# EAGLE board zerofat2_old (EAGLE 7.5.0)
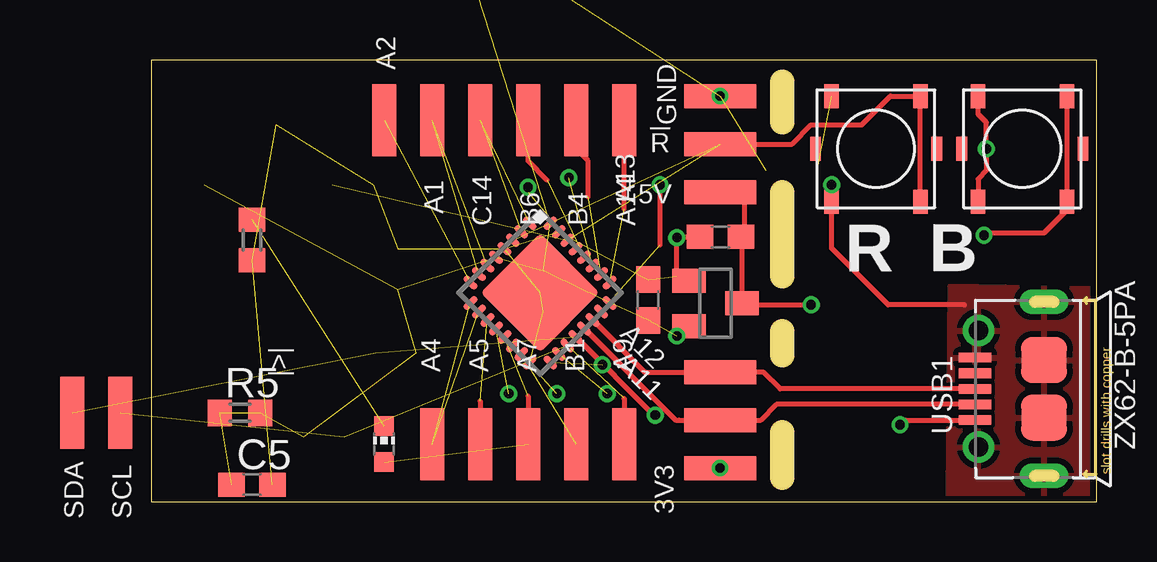
[diagram p0: board, top side]
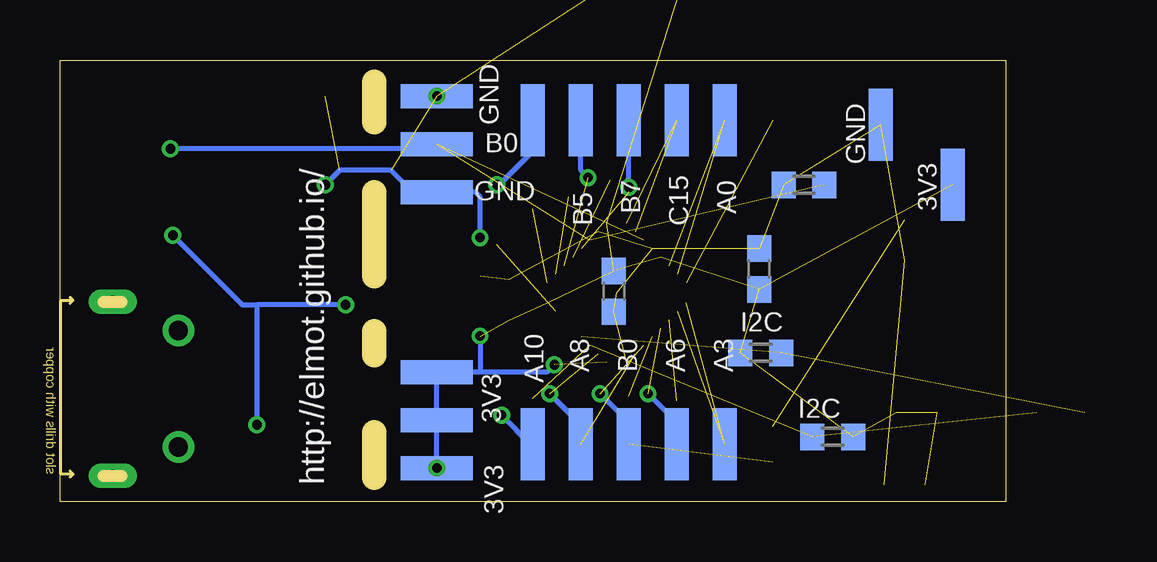
[diagram p1: board, bottom side, seen from below]

Size 39.4 x 18.4 mm. Coordinates in mm from the lower left corner, seen from the top.
Outline: 26.3,1 26.3,2.9
Outline: 26.3,9.4 26.3,12.9
Outline: 26.3,15.8 26.3,17.5
Outline: 26.3,6.1 26.3,7.1
Outline: 0,0 39.4,0 39.4,18.4 0,18.4 0,0
Copper layers (1*16): Top 0.035mm / dielectric 1.5mm / Bottom 0.035mm
Design rules "SeeedStudio_2layer_DRU_no_angle_20140221 *": minimum track width 6mil, minimum drill 12mil, track to track 6mil, track to pad 6mil, pad to pad 6mil, via to via 6mil, smd to smd 0mil, copper to edge 10mil, drill to drill 10mil, minimum pad ring 10mil, minimum via ring 6mil, stop-mask expansion 2mil, vias tented up to drill 100mil, thermal gap 10mil
Net classes: 0 default: width 0.2 mm; 1 PWR: width 0.2 mm; 2 GND: width 0.2 mm

## Footprints (pad centres in the part's own frame; a part is rotated, then mirrored left to right if it is on the bottom)
EVQPT5A15 = smd 0.45 x 1: GND1 -2.525,0; GND2 2.525,0 | smd 0.6 x 1: P1 -1.85,-2.2; P2 -1.85,2.2; P3 1.85,2.2; P4 1.85,-2.2
C0603 = smd 1.1 x 1: 1 -0.85,0; 2 0.85,0
SOT23 = smd 1 x 1.4: 1 -0.95,-1.1; 2 0.95,-1.1; 3 0,1.1
CHIP-LED0603 = smd 0.8 x 0.8: A 0,-0.75; C 0,0.75
PAD_MINIMAL = smd 1 x 3: 1 0,0
R0603 = smd 1 x 1.1: 1 -0.85,0; 2 0.85,0
UFQFPN32 = smd 0.7 x 0.3: 1 -2.35,1.75; 2 -2.35,1.25; 3 -2.35,0.75; 4 -2.35,0.25; 5 -2.35,-0.25; 6 -2.35,-0.75; 7 -2.35,-1.25; 8 -2.35,-1.75; 17 2.35,-1.75; 18 2.35,-1.25; 19 2.35,-0.75; 20 2.35,-0.25; 21 2.35,0.25; 22 2.35,0.75; 23 2.35,1.25; 24 2.35,1.75 | smd 0.3 x 0.7: 9 -1.75,-2.35; 10 -1.25,-2.35; 11 -0.75,-2.35; 12 -0.25,-2.35; 13 0.25,-2.35; 14 0.75,-2.35; 15 1.25,-2.35; 16 1.75,-2.35; 25 1.75,2.35; 26 1.25,2.35; 27 0.75,2.35; 28 0.25,2.35; 29 -0.25,2.35; 30 -0.75,2.35; 31 -1.25,2.35; 32 -1.75,2.35 | smd 3.5 x 3.5: EXP 0,0
MICRO-USB5+6P-SMD-0.65-AB = smd 0.4 x 1.35: 1 -1.3,2.875; 2 -0.65,2.875; 3 0,2.875; 4 0.65,2.875; 5 1.3,2.875 | smd 1.9 x 1.9: P1 -1.2,0; P2 1.2,0 | drill 0.508 pad 1.016 long: P3 -3.625,0; P4 3.625,0 | drill 0.8: P5 -2.425,2.73; P6 2.425,2.73

## Placement (x,y rotation side)
B  EVQPT5A15  [EVQPT5A15]  36.3,14.7 0 top
C1  1uF  [C0603]  23.72,11.03 180 top
C2  100nF  [C0603]  13.98,22.65 180 bottom  (outside the outline)
C3  100nF  [C0603]  16.33,8.76 270 bottom
C4  100nF  [C0603]  10.27,9.69 90 bottom
C5  1uF  [C0603]  4.2,0.7 0 top
C6  4.7uF  [C0603]  20.7,8.4 270 top
IC1  MCP1703T-3302E/CB  [SOT23]  23.51,8.26 270 top
LED1  ORANGE  [CHIP-LED0603]  9.7,2.4 0 top
PAD1  SCL  [PAD_MINIMAL]  -1.3,3.7 0 top
PAD2  SDA  [PAD_MINIMAL]  -3.3,3.7 0 top  (outside the outline)
PAD3  C14  [PAD_MINIMAL]  13.7,15.9 0 top
PAD4  C15  [PAD_MINIMAL]  13.7,15.9 0 bottom
PAD6  !R  [PAD_MINIMAL]  23.7,14.9 90 top
PAD8  A0  [PAD_MINIMAL]  11.7,15.9 0 bottom
PAD9  A2  [PAD_MINIMAL]  9.7,15.9 0 top
PAD10  A1  [PAD_MINIMAL]  11.7,15.9 0 top
PAD11  A3  [PAD_MINIMAL]  11.7,2.4 180 bottom
PAD12  A5  [PAD_MINIMAL]  13.7,2.4 180 top
PAD13  A7  [PAD_MINIMAL]  15.7,2.4 180 top
PAD14  B1  [PAD_MINIMAL]  17.7,2.4 180 top
PAD16  A4  [PAD_MINIMAL]  11.7,2.4 180 top
PAD17  A6  [PAD_MINIMAL]  13.7,2.4 180 bottom
PAD18  B0  [PAD_MINIMAL]  15.7,2.4 180 bottom
PAD24  A8  [PAD_MINIMAL]  17.7,2.4 180 bottom
PAD25  A9  [PAD_MINIMAL]  19.7,2.4 180 top
PAD26  A10  [PAD_MINIMAL]  19.7,2.4 180 bottom
PAD27  A13  [PAD_MINIMAL]  19.7,15.9 180 bottom
PAD29  A12  [PAD_MINIMAL]  23.7,5.4 270 top
PAD30  A11  [PAD_MINIMAL]  23.7,3.4 270 top
PAD31  A14  [PAD_MINIMAL]  19.7,15.9 0 top
PAD33  B5  [PAD_MINIMAL]  17.7,15.9 0 bottom
PAD34  B7  [PAD_MINIMAL]  15.7,15.9 0 bottom
PAD35  B0  [PAD_MINIMAL]  23.7,14.9 90 bottom
PAD36  B6  [PAD_MINIMAL]  15.7,15.9 0 top
PAD37  B4  [PAD_MINIMAL]  17.7,15.9 0 top
PAD39  GND  [PAD_MINIMAL]  23.7,16.9 270 top
PAD43  3V3  [PAD_MINIMAL]  23.7,1.4 270 top
PAD45  5V  [PAD_MINIMAL]  23.7,12.9 270 top
PAD48  3V3  [PAD_MINIMAL]  23.7,1.4 90 bottom
PAD49  GND  [PAD_MINIMAL]  23.7,16.9 90 bottom
PAD50  GND  [PAD_MINIMAL]  23.7,12.9 90 bottom
PAD51  GND  [PAD_MINIMAL]  5.2,15.7 180 bottom
PAD52  3V3  [PAD_MINIMAL]  23.7,5.4 270 bottom
PAD53  3V3  [PAD_MINIMAL]  23.7,3.4 90 bottom
PAD54  3V3  [PAD_MINIMAL]  2.2,13.2 180 bottom
R  EVQPT5A15  [EVQPT5A15]  30.2,14.7 0 top
R1  2.2K  [R0603]  4.2,10.9 270 top
R2  I2C  [R0603]  7.2,2.7 180 bottom
R3  I2C  [R0603]  10.2,6.2 180 bottom
R4  2.2K  [R0603]  8.4,13.2 0 bottom
R5  10R  [R0603]  3.7,3.7 0 top
U$1  STM32L082K  [UFQFPN32]  16.2,8.7 315 top
USB1  ZX62-B-5PA  [MICRO-USB5+6P-SMD-0.65-AB]  37.2,4.7 90 top

## Library data of the parts
B PAD1-PAD4 PAD6 PAD8-PAD14 PAD16-PAD18 PAD24-PAD27 PAD29-PAD31 PAD33-PAD37 PAD39 PAD43 PAD45 PAD48-PAD54 R U$1 = zerofat
C1-C6 R1-R5 = rcl
IC1 = v-reg
LED1 = led
USB1 = Seeed-OPL-Connector; MPN: ZX62-B-5PA

## Nets
+3V3 [PWR]: C2.1 C3.1 C4.1 C5.1 C6.2 IC1.2 PAD43.1 PAD48.1 PAD52.1 PAD53.1 PAD54.1 R2.1 R3.2 R5.1 R5.2 U$1.5 U$1.17 U$1.24 U$1.32
+5V: B.P3 B.P4 C1.1 IC1.3 PAD45.1 USB1.1
GND: C1.2 C2.2 C3.2 C4.2 C5.2 C6.1 IC1.1 PAD39.1 PAD49.1 PAD50.1 PAD51.1 R1.2 R4.1 R.P1 R.P2 U$1.4 U$1.16 U$1.31 U$1.EXP USB1.5 USB1.P1 USB1.P2 USB1.P3 USB1.P4 USB1.P5 USB1.P6
N$1: PAD30.1 U$1.21 USB1.2
N$2: LED1.A PAD18.1 U$1.14
N$3: PAD27.1 U$1.23
N$4: PAD29.1 U$1.22 USB1.3
N$5: PAD31.1 U$1.25
N$6: PAD3.1 U$1.1
N$7: PAD37.1 U$1.26
N$8: PAD33.1 U$1.27
N$9: PAD36.1 U$1.28
N$10: PAD4.1 U$1.2
N$11: PAD8.1 U$1.6
N$12: PAD10.1 U$1.7
N$13: PAD9.1 U$1.8
N$14: PAD11.1 U$1.9
N$15: PAD16.1 U$1.10
N$16: PAD12.1 U$1.11
N$17: PAD17.1 U$1.12
N$18: PAD13.1 U$1.13
N$19: PAD24.1 U$1.18
N$20: PAD14.1 U$1.15
N$21: PAD1.1 PAD25.1 R2.2 U$1.19
N$22: PAD34.1 U$1.29
N$23: PAD2.1 PAD26.1 R3.1 U$1.20
N$41: LED1.C R1.1
N$43: B.P1 B.P2 PAD35.1 R4.2 U$1.30
N$45: PAD6.1 R.P3 R.P4 U$1.3

## Tracks (layer width: path | path; a pad name or v marks a point on that pad's centre or on a via)
+3V3  (via drill 0.4)  (14 unrouted)
  Top 0.2: IC1.2 22,6.9 v21.9,6.9
  Bottom 0.2: PAD48.1 PAD53.1 PAD52.1 21.9,5.4 | 21.9,5.4 19.1,5.4 v18.8,5.7 | v21.9,6.9 21.9,5.4
  other vias: 23.7,1.4
+5V  (via drill 0.4)
  Top 0.2: PAD45.1 24.7,12.9 24.7,11.03 C1.1 24.61,10.99 IC1.3 24.59,8.26 24.65,8.2 v27.5,8.2 | B.P3 B.P4 38.15,12.15 37.2,11.2 34.8,11.2 v34.7,11.1 | v31.2,3.2 31.4,3.4 USB1.1
  Bottom 0.2: v27.5,8.2 31.2,8.2 | v34.7,11.1 31.8,8.2 31.2,8.2 | 31.2,8.2 v31.2,3.2
GND  (via drill 0.4)  (14 unrouted)
  Top 0.2: 33.9,8.2 30.7,8.2 28.35,10.55 v28.35,13.2 R.P1 | IC1.1 22.2,9.42 22.18,9.4 21.9,9.4 v21.9,11 21.93,11.03 C1.2
  Bottom 0.2: v28.35,13.2 27.75,13.8 25.6,13.8 24.7,12.9 PAD50.1 22.1,12.9 21.9,12.7 v21.9,11
  other vias: 23.7,16.9
  pour Top: 33.3,9 39.1,8.9 39,0.1 33.2,0.2
N$1
  Top 0.2: PAD30.1 25.4,3.4 26.05,4.05 USB1.2 | 22,3.4 PAD30.1 | U$1.21 21.85,3.4 PAD30.1
N$2  (via drill 0.4)  (2 unrouted)
  Bottom 0.2: PAD18.1 16,2.7 16,3.6 v16.9,4.5
N$3  (via drill 0.4)  (1 unrouted)
  Top 0.2: 21.2,10.7 v21.2,13.2
  Bottom 0.2: v21.2,13.2 21.1,13.2 19.8,14.5 19.8,15.8 PAD27.1
N$4
  Top 0.2: USB1.3 26.2,4.7 25.5,5.4 PAD29.1 20.56,5.4 U$1.22
N$5  (1 unrouted)
  Top 0.2: 19.7,12.2 PAD31.1
N$6  (1 unrouted)
N$7  (1 unrouted)
  Top 0.2: 18.2,12.7 18.2,14.2 17.7,14.7 PAD37.1
N$8  (via drill 0.4)  (1 unrouted)
  Bottom 0.2: v17.4,13.5 17.7,13.8 PAD33.1
N$9  (1 unrouted)
  Top 0.2: 16.5,13.4 15.7,14.2 PAD36.1
N$10  (1 unrouted)
N$11  (1 unrouted)
N$12  (1 unrouted)
N$13  (1 unrouted)
N$14  (1 unrouted)
N$15  (1 unrouted)
N$16  (1 unrouted)
  Top 0.2: 13.7,4.2 PAD12.1
N$17  (via drill 0.4)  (1 unrouted)
  Bottom 0.2: PAD17.1 14,2.7 14,3.6 v14.9,4.5
N$18  (1 unrouted)
  Top 0.2: 15.7,4.4 PAD13.1
N$19  (via drill 0.4)  (1 unrouted)
  Bottom 0.2: v19,4.5 17.7,3.2 PAD24.1
N$20  (1 unrouted)
N$21  (3 unrouted)
  Top 0.2: 19.7,4.3 PAD25.1
N$22  (via drill 0.4)  (1 unrouted)
  Top 0.2: 15.7,12.9 v15.7,13.1
  Bottom 0.2: v15.7,13.1 PAD34.1
N$23  (via drill 0.4)  (2 unrouted)
  Top 0.2: U$1.20 20.95,3.6 v21,3.6
  Bottom 0.2: v21,3.6 19.8,2.4 PAD26.1
N$41  (1 unrouted)
N$43  (via drill 0.4)  (2 unrouted)
  Top 0.2: B.P2 34.45,16.15 34.8,15.8 v34.8,14.7 34.8,13.8 34.45,13.45 B.P1
  Bottom 0.2: PAD35.1 23.9,14.7 v34.8,14.7
N$45  (1 unrouted)
  Top 0.2: PAD6.1 26.7,14.9 27.5,15.7 29.6,15.7 30.8,16.9 R.P3 R.P4

## Text on the board
tNames: R | B | |>|
bNames: http://elmot.github.io/
bValues: 4x / 100nF
bStop: (c)elmot | ZeroFat32